# Altium PCB PCB.PcbDoc
Units mil, origin at the board's own origin, x right, y up, seen from the top; angles counter-clockwise.
Board outline 1500 x 1625 mil, 2 copper layers (Top Layer, Bottom Layer); 3 components, 9 nets, 38 pads, 16 vias.
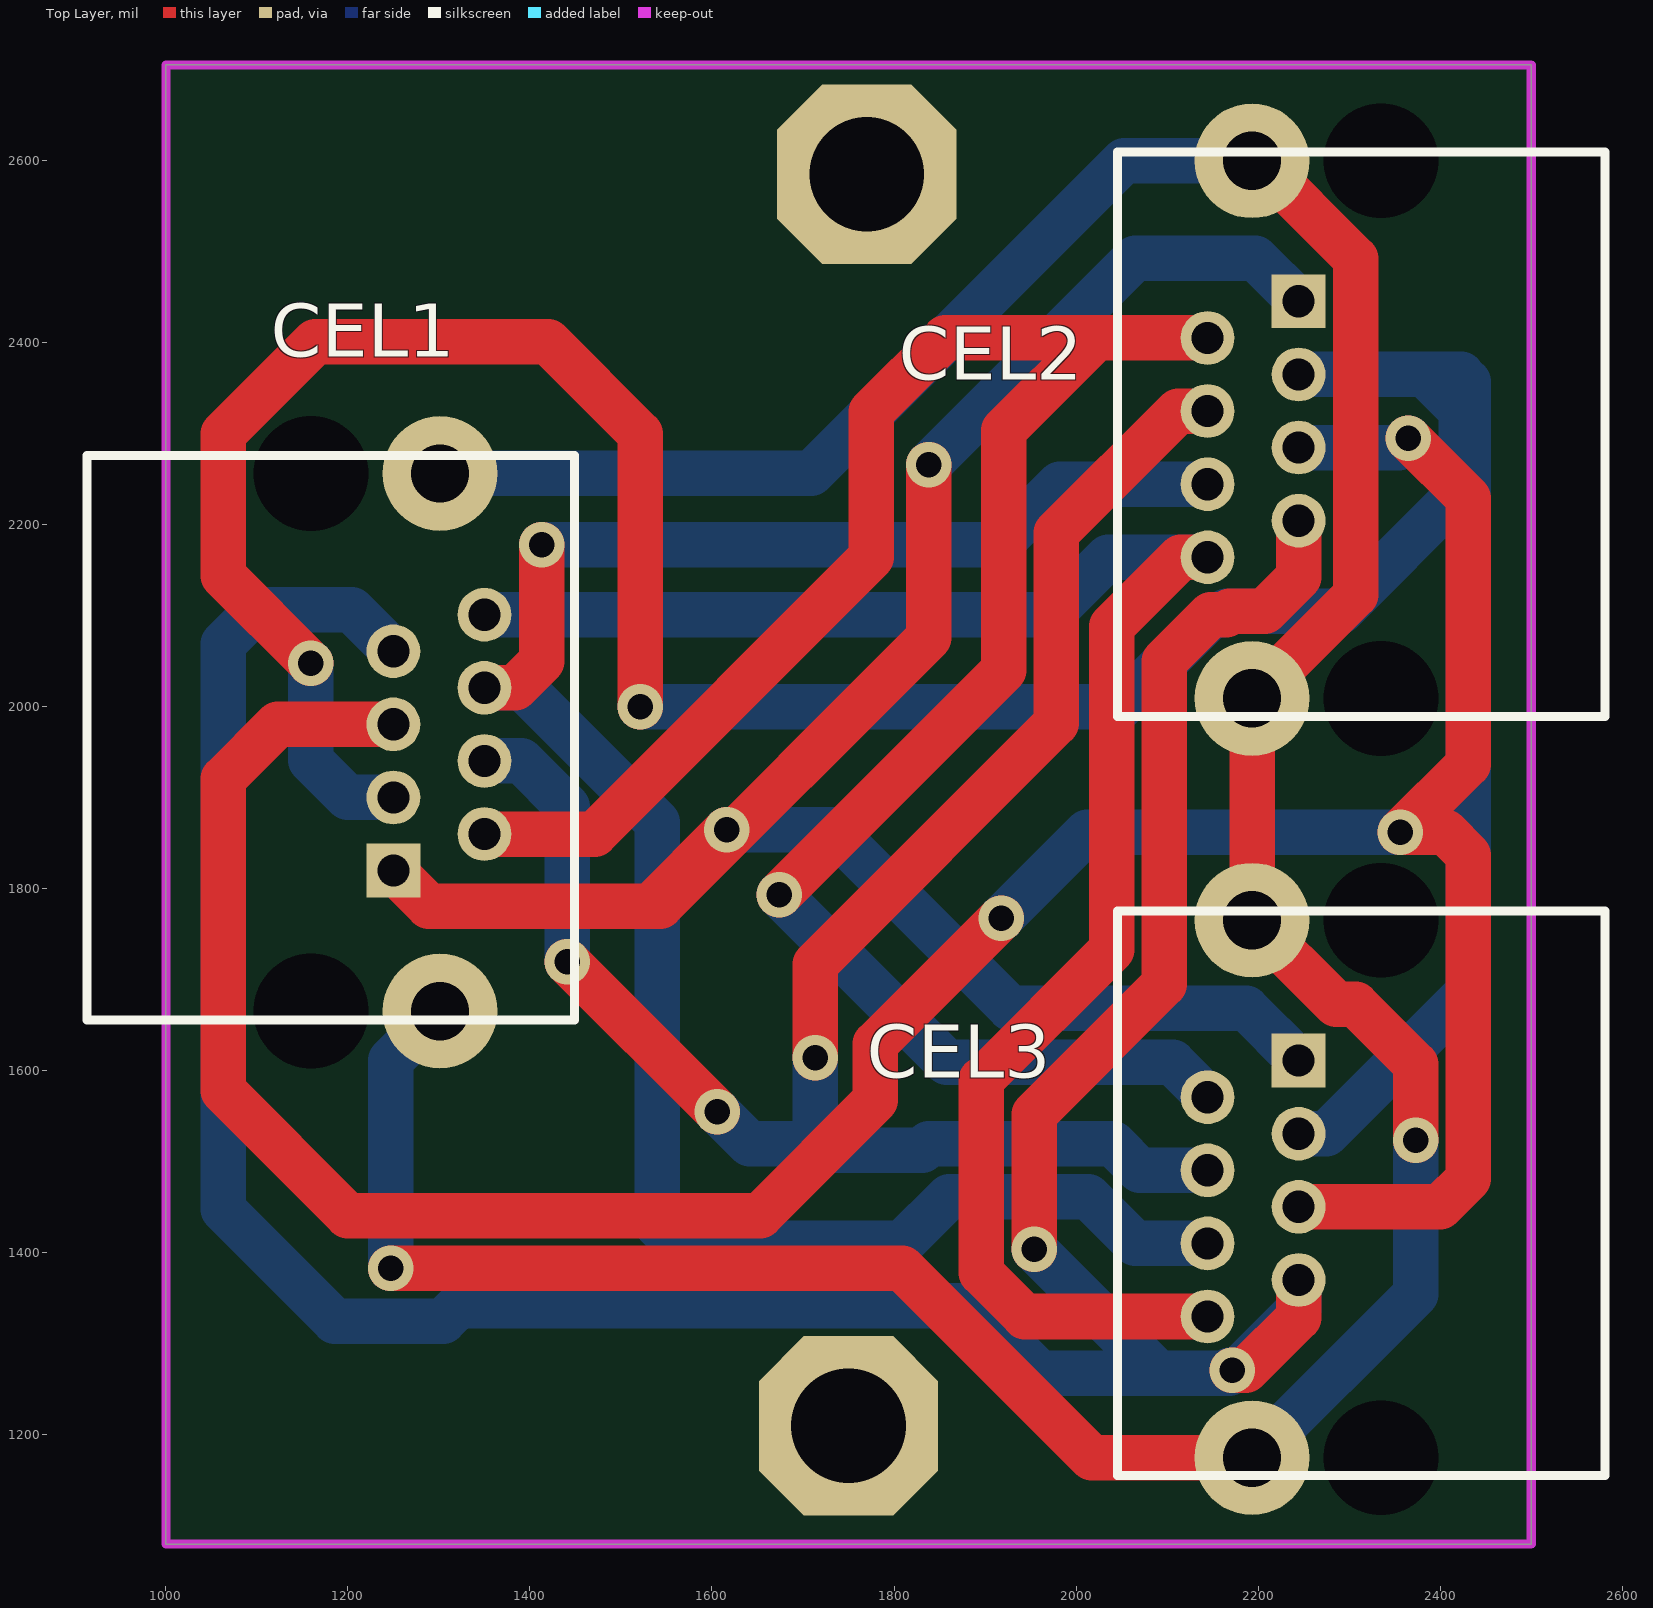
[diagram p0: Top Layer view]
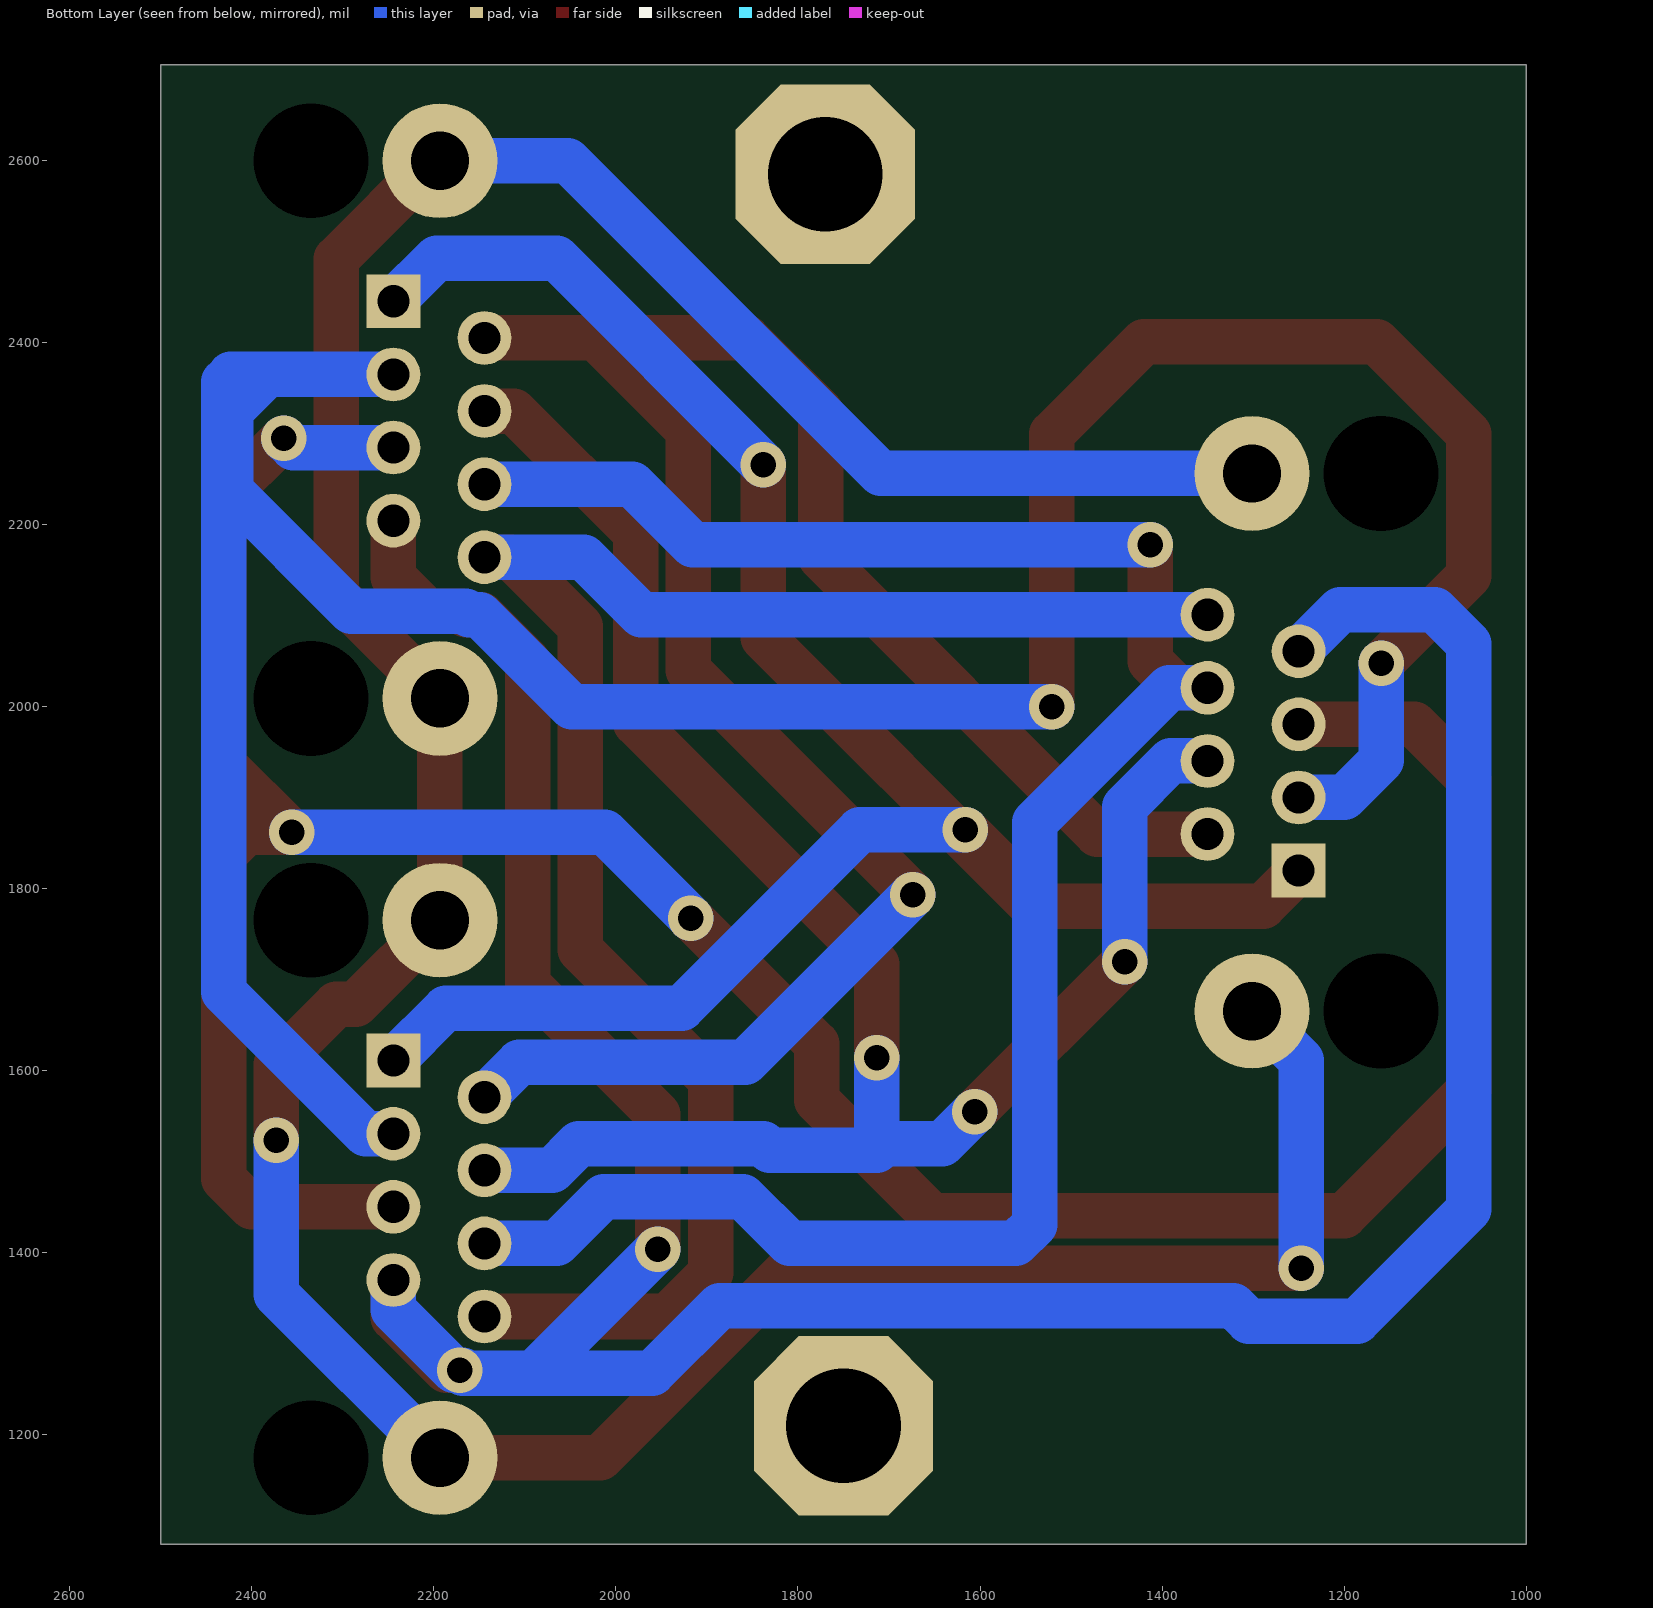
[diagram p1: Bottom Layer view, seen from below]
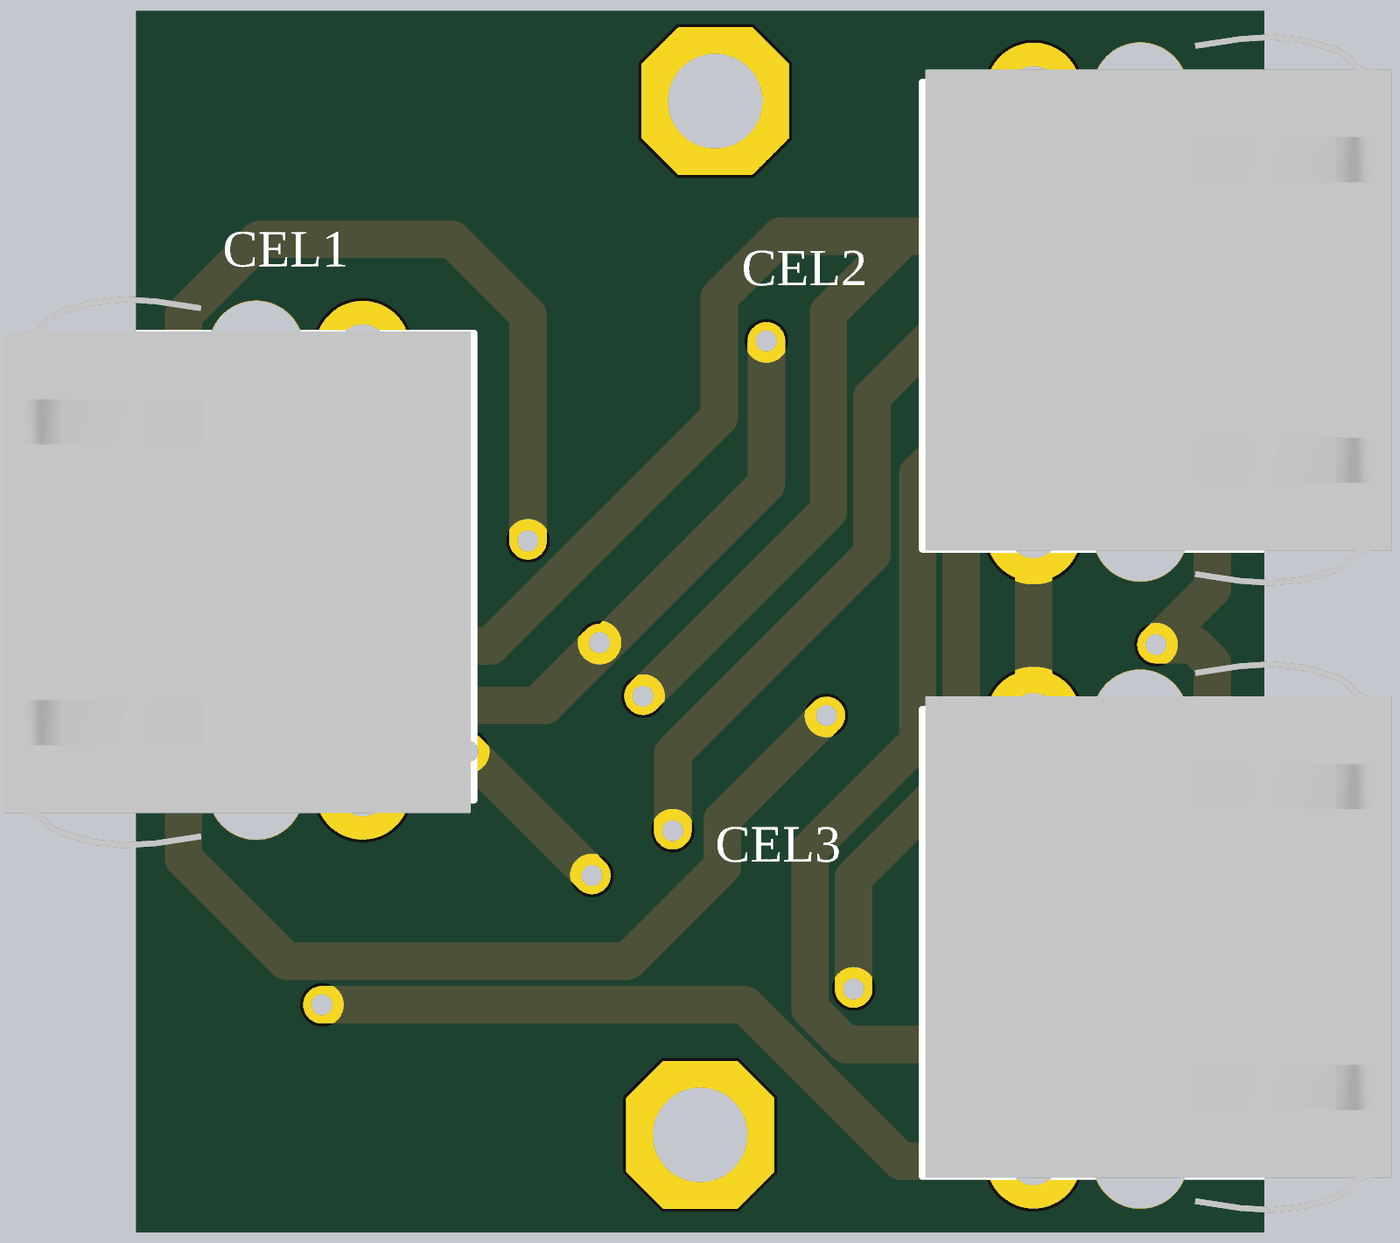
[diagram p2: 3D render of the assembled board from above, using the file's embedded part models]

## Layer stack, top to bottom
Top Solder: solder mask 0.4, Solder Resist, Dk 3.5
Top Layer: signal copper 1.4
Dielectric 1: dielectric 12.6, FR-4, Dk 4.8
Bottom Layer: signal copper 1.4
Bottom Solder: solder mask 0.4, Solder Resist, Dk 3.5

## Board outline
1000,1080 2500,1080 2500,2705 1000,2705

## Design rules (kind name [scope] priority, off if disabled: settings)
Clearance [All] p1: gap=7.87 ignorepadtopadclearanceinfootprint=FALSE except(0: Arc-Hole Track-Hole SMDPad-Hole THPad-Hole Via-Hole Fill-Hole Poly-Hole Region-Hole Text-Hole)
PolygonConnect [All] p1: connectstyle=Relief reliefconductorwidth=10 reliefentries=4 polygonreliefangle="90 Angle" airgapwidth=10
RoomDefinition Sheet1 [InComponentClass('Sheet1')] p1: confinementstyle=ConfineOut formatcopy=TRUE lockcomponents=FALSE outline 7045,1060 7685,1060 7685,1905 7045,1905
RoutingVias [All] p1: holewidth=28 width=50 viastyle="Through Hole" minholewidth=28 minwidth=50 maxholewidth=28 maxwidth=50
SolderMaskExpansion [All] p1: expansion=4
Width [All] p1: maxlimit=100 minlimit=50 preferedwidth=50 minimp=50.000000 maximp=50.000000 favimp=50.000000
30 further rules are at their usual default settings.

## Components (designator, comment, footprint, x,y, rotation, side; value= is the part's Value field where it differs from the comment)
CEL1 "CN_MODJACK_8P" "CN_RJ45_TYCO_ DY122-8P8C-G" 1159.45,2256.22 r270 top
CEL2 "CN_MODJACK_8P" "CN_RJ45_TYCO_ DY122-8P8C-G" 2335,2009.09 r90 top
CEL3 "CN_MODJACK_8P" "CN_RJ45_TYCO_ DY122-8P8C-G" 2335,1175 r90 top

## Footprints (in the part's own frame and the unit in brackets; to place one, negate y for a bottom-side part, rotate by r counter-clockwise, add the part's x,y. Pads: shape width x height; smd on the part's side, far side on the other; paste and mask are expansions set on the pad)
"CN_RJ45_TYCO_ DY122-8P8C-G" [mm] "DY122-8P8C-G javan"
  rect 1.5x1.5 hole 0.9: 1(11.08,2.3)
  round 1.5 hole 0.9: 2(10.06,4.84) 3(9.04,2.3) 4(8.02,4.84) 5(7,2.3) 6(5.98,4.84) 7(4.96,2.3) 8(3.94,4.84)
  round 3.2 hole 1.63: 9(0,3.6) 9(15,3.6)
  round 0 hole 3.2: " "(0,0) " "(15,0)
  silkscreen extent -0.5,-6.25 15.25,7.35, body extent -1.75,-8.5 16.89,7.25, height 14.6

## Free pads (board coordinates)
  oct 196.85x196.85 hole 125.98: 0(1750,1210) 0(1770,2585)

## Via types
v1: diameter 50, hole 28, Top Layer to Bottom Layer, 16 vias

## Nets (pads, with @x,y where several pads share a name; then routed paths per layer and width w, separated by ;. In a path a pad name is that pad's centre, name@x,y a point inside that pad or via, vN(x,y) a via of type N, cw(c..) or ccw(c..) an arc to the next point about the centre after c; other vN are vias at no path point)
1: CEL1.1 CEL2.1 CEL3.1 | length 2288.3
  Top Layer w50: CEL1.1 1289,1781 1532.4,1781 ; v1(1616.13,1864.72) 1532.4,1781 ; v1(1838,2266) 1838,2075.62 1543.38,1781 1532.4,1781
  Bottom Layer w50: v1(1616.13,1864.72) 1731.87,1864.72 1927.6,1669 2186.67,1669 CEL3.1 ; v1(1838,2266) 2064.76,2492.76 2197,2492.76 CEL2.1
2: CEL1.2 CEL2.2 CEL3.2 | length 2432.1
  Top Layer w50: CEL1.2 1471.05,1860.16 1775.13,2164.24 1775.13,2323.87 1856.41,2405.16 2022.03,2405.16 ; v1(1674,1793.5) 1920.44,2039.93 1920.44,2303.56 2022.03,2405.16 ; CEL2.2 2022.03,2405.16
  Bottom Layer w50: v1(1674,1793.5) 1857.98,1609.51 2106,1609.51 CEL3.2
3: CEL1.3 CEL2.3 CEL3.3 | length 3608.5
  Top Layer w50: v1(1159,2048) 1063,2144 1063,2300 1164,2401 1420,2401 1521,2300 v1(1521,2000)
  Bottom Layer w50: v1(1159,2048) 1159,1941.32 1200,1900.32 CEL1.3 ; v1(1521,2000) 2048.6,2000 2149.6,2101 2161,2101 2165,2105 2290.75,2105 2422.87,2237.13 2422.87,2325 2382.87,2365 ; CEL3.3 2275,1530.91 2431,1686.91 2431,2356.87 2422.87,2356.87 2422.87,2365 2382.87,2365 ; CEL2.3 2382.87,2365
4: CEL1.4 CEL2.4 CEL3.4 | length 2092.9
  Top Layer w50: v1(1441,1720) v1(1606,1555) ; v1(1713.48,1614.48) 1713.48,1717.23 1978.31,1982.06 1978.31,2191.11 2112.05,2324.84 CEL2.4
  Bottom Layer w50: CEL1.4 1390.68,1940.47 1441,1890.15 v1(1441,1720) ; v1(1606,1555) 1641.25,1519.75 1713.48,1519.75 ; v1(1713.48,1614.48) 1713.48,1519.75 ; CEL3.4 2069.75,1490.75 2040.75,1519.75 1838.25,1519.75 1831.25,1512.75 1713.48,1512.75 1713.48,1519.75
5: CEL1.5 CEL2.5 CEL3.5 | length 3371.3
  Top Layer w50: CEL1.5 1123,1980.63 1063,1920.63 1063,1578 1200,1441 1653,1441 1779.54,1567.54 1779.54,1629.54 v1(1917.84,1767.84) ; CEL3.5 2400,1450.59 2431,1481.59 2431,1837 2406,1862 v1(2356,1862) 2431,1937 2431,2229 v1(2365,2295)
  Bottom Layer w50: v1(1917.84,1767.84) 2012,1862 v1(2356,1862) ; CEL2.5 2354.69,2284.69 v1(2365,2295)
6: CEL1.6 CEL2.6 CEL3.6 | length 2310.9
  Top Layer w50: CEL1.6 1383.79,2020.79 1413,2050 v1(1413,2178)
  Bottom Layer w50: CEL1.6 1392.21,2020.79 1540,1873 1540,1431 1560.57,1410.43 1809.05,1410.43 1860.49,1461.87 2013.31,1461.87 2064.75,1410.43 CEL3.6 ; v1(1413,2178) 1915.66,2178 1982.19,2244.53 CEL2.6
7: CEL1.7 CEL2.7 CEL3.7 | length 3466.8
  Top Layer w50: v1(1954,1404) 1954,1552.36 2097,1695.36 2097,2050 2148,2101 2165,2101 2169,2105 2207.33,2105 2244.45,2142.12 CEL2.7 ; v1(2171.28,1271) 2186.45,1271 2244.45,1329 CEL3.7
  Bottom Layer w50: CEL1.7 1204.33,2106.61 1100.49,2106.61 1063,2069.12 1063,1447.7 1185.57,1325.13 1304.87,1325.13 1321.75,1342 1886,1342 1960.28,1267.72 2090.28,1267.72 ; v1(1954,1404) 2090.28,1267.72 ; CEL3.7 2244.45,1337.45 2178,1271 v1(2171.28,1271) ; 2090.28,1267.72 v1@2164.72,1267.72 ; v1@2164.72,1267.72 2168,1267.72 v1(2171.28,1271) ; v1@2164.72,1267.72 2168,1271 v1(2171.28,1271)
8: CEL1.8 CEL2.8 CEL3.8 | length 1995.3
  Top Layer w50: CEL3.8 1943.86,1330.12 1896,1377.98 1896,1590 2039.13,1733.13 2039.13,2088.47 2114.87,2164.21 CEL2.8
  Bottom Layer w50: CEL1.8 1972.06,2101.1 2035.17,2164.21 CEL2.8
9: CEL1.9 CEL2.9 CEL3.9 | length 4055.6
  Top Layer w50: v1(1247,1383) 1809.13,1383 2017.13,1175 CEL3.9@2193.27,1175 ; CEL2.9@2193.27,2599.65 2199.42,2599.65 2307,2492.07 2307,2122.83 2193.27,2009.09 2193.27,1765.55 2285.82,1673 2307,1673 2373,1607 v1(2373,1524)
  Bottom Layer w50: v1(1247,1383) 1247,1611.49 CEL1.9@1301.18,1665.67 ; CEL1.9@1301.18,2256.22 1709.22,2256.22 2052.65,2599.65 CEL2.9@2193.27,2599.65 ; CEL3.9@2193.27,1175 2373,1354.73 v1(2373,1524)
pads on no net: "CEL1. " "CEL2. " "CEL3. "

## Keep-outs
Top Layer:
  the board outline again, w10